# Allegro board pc042b_vsupply5v_02.brd
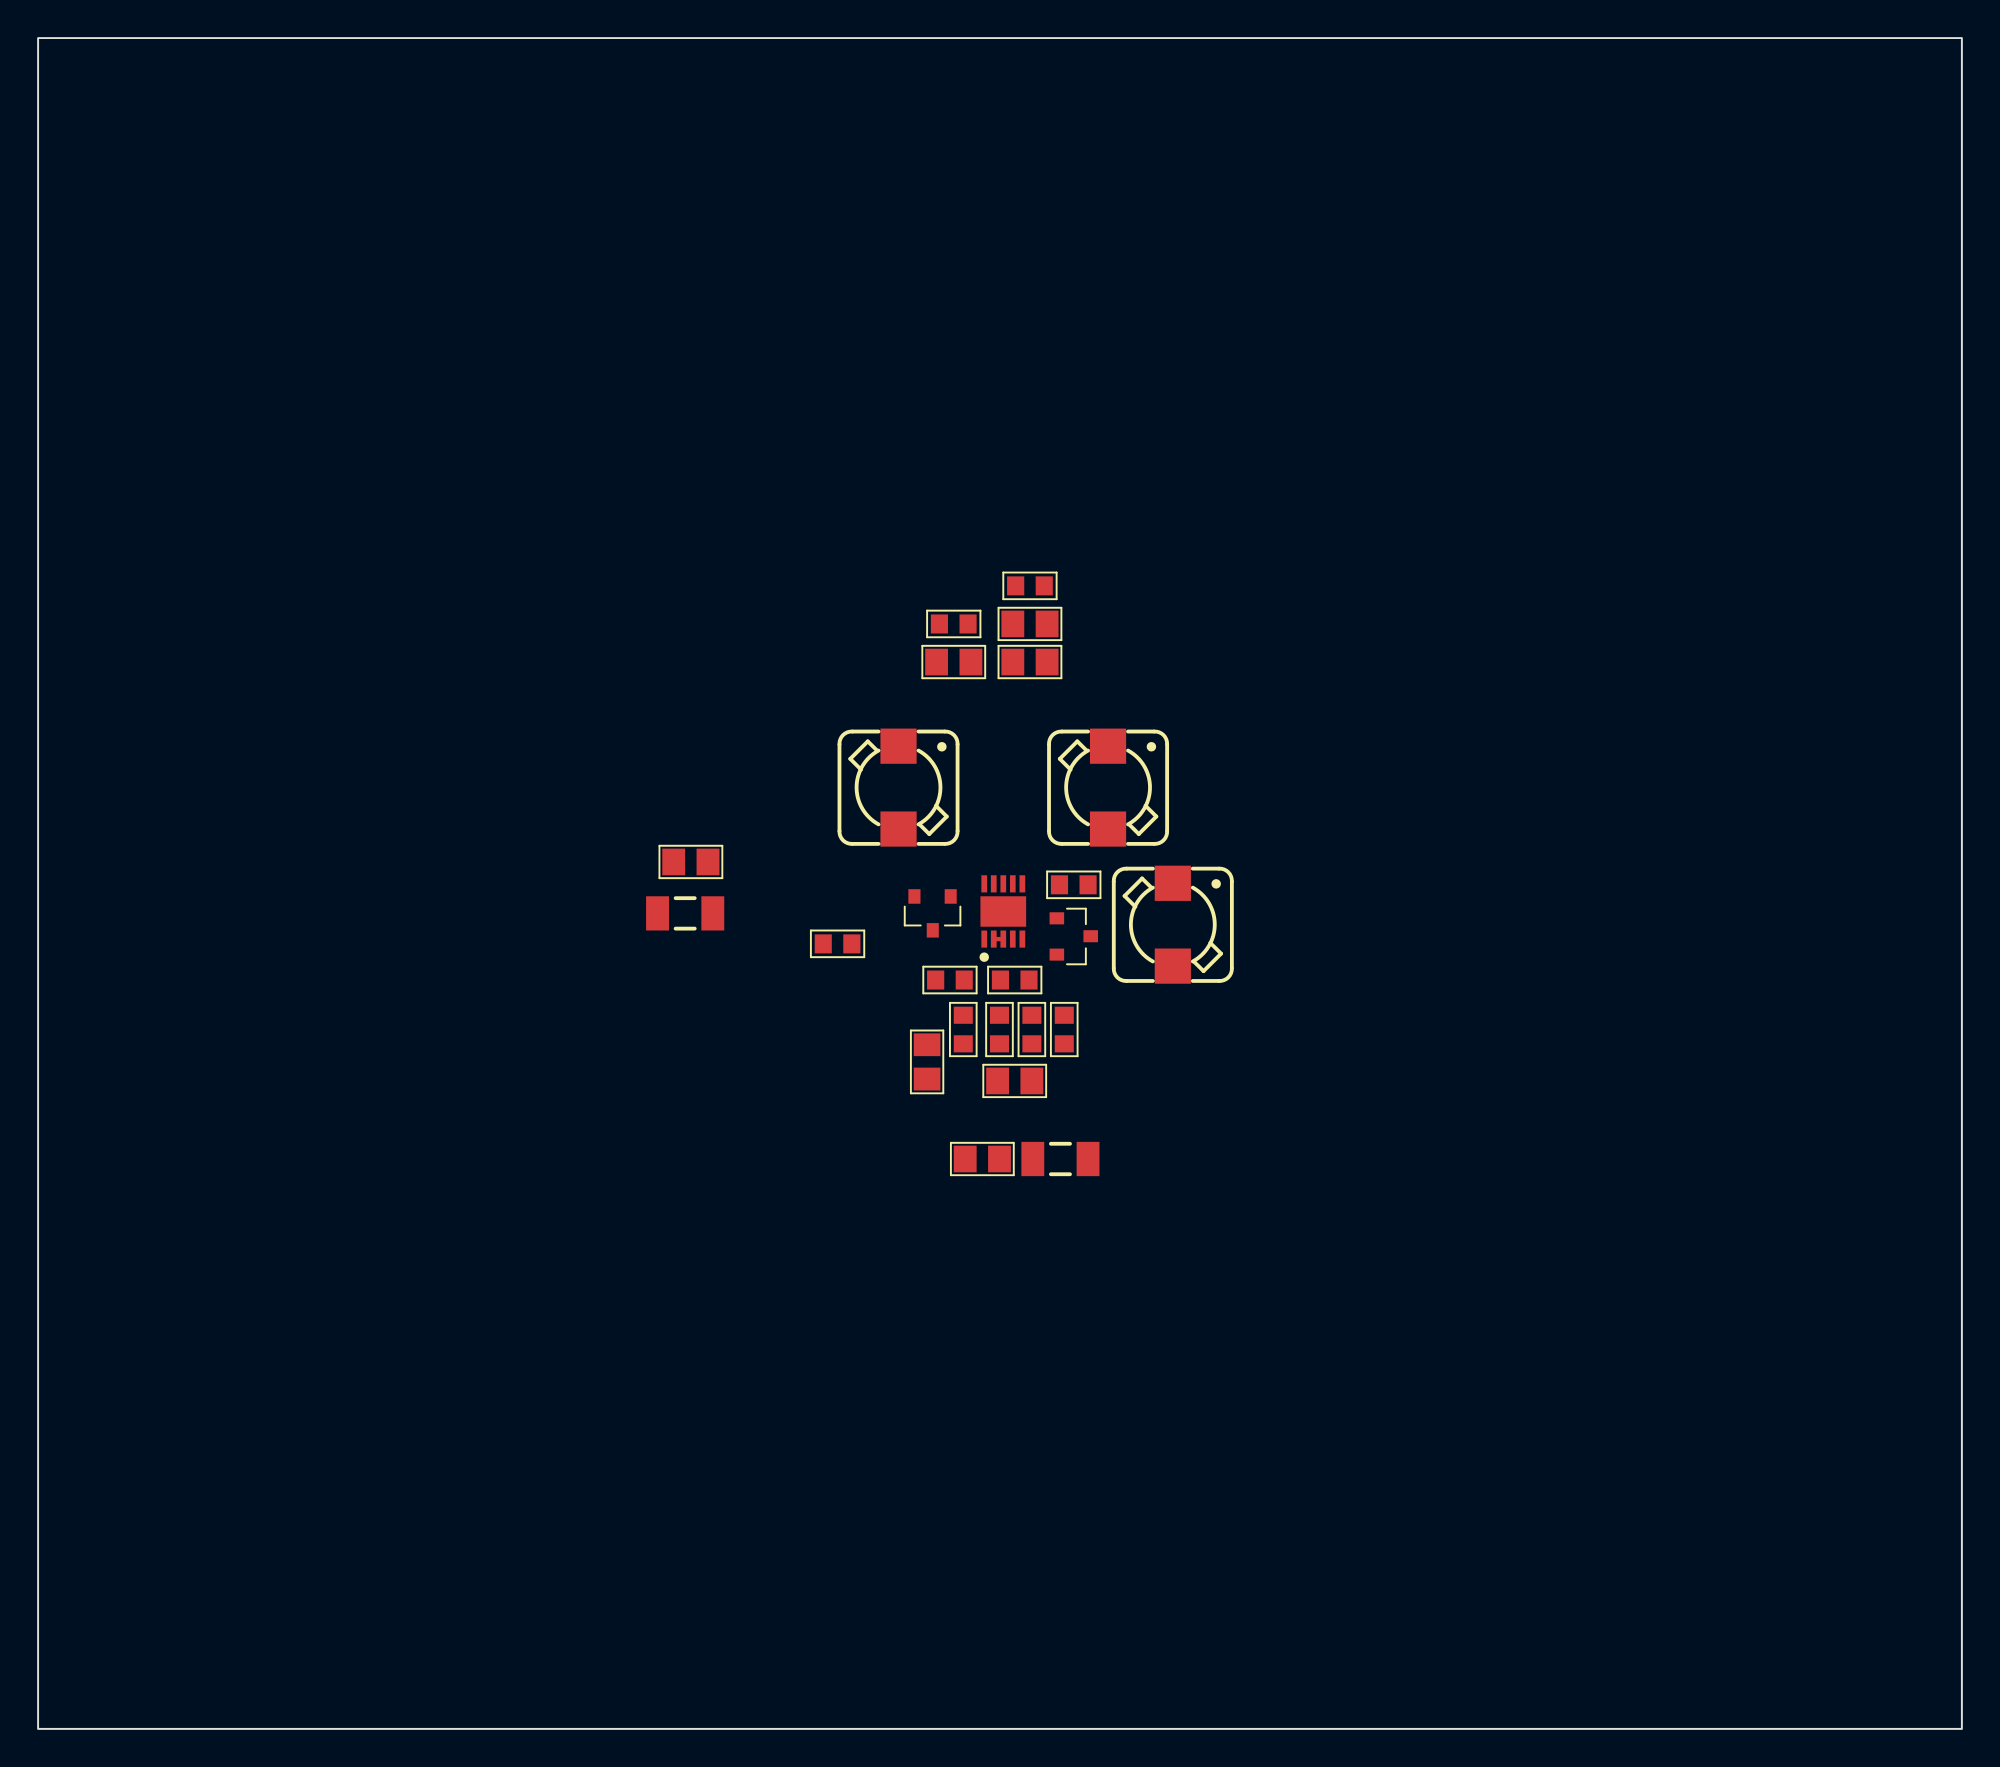
[diagram p0: board, top side]
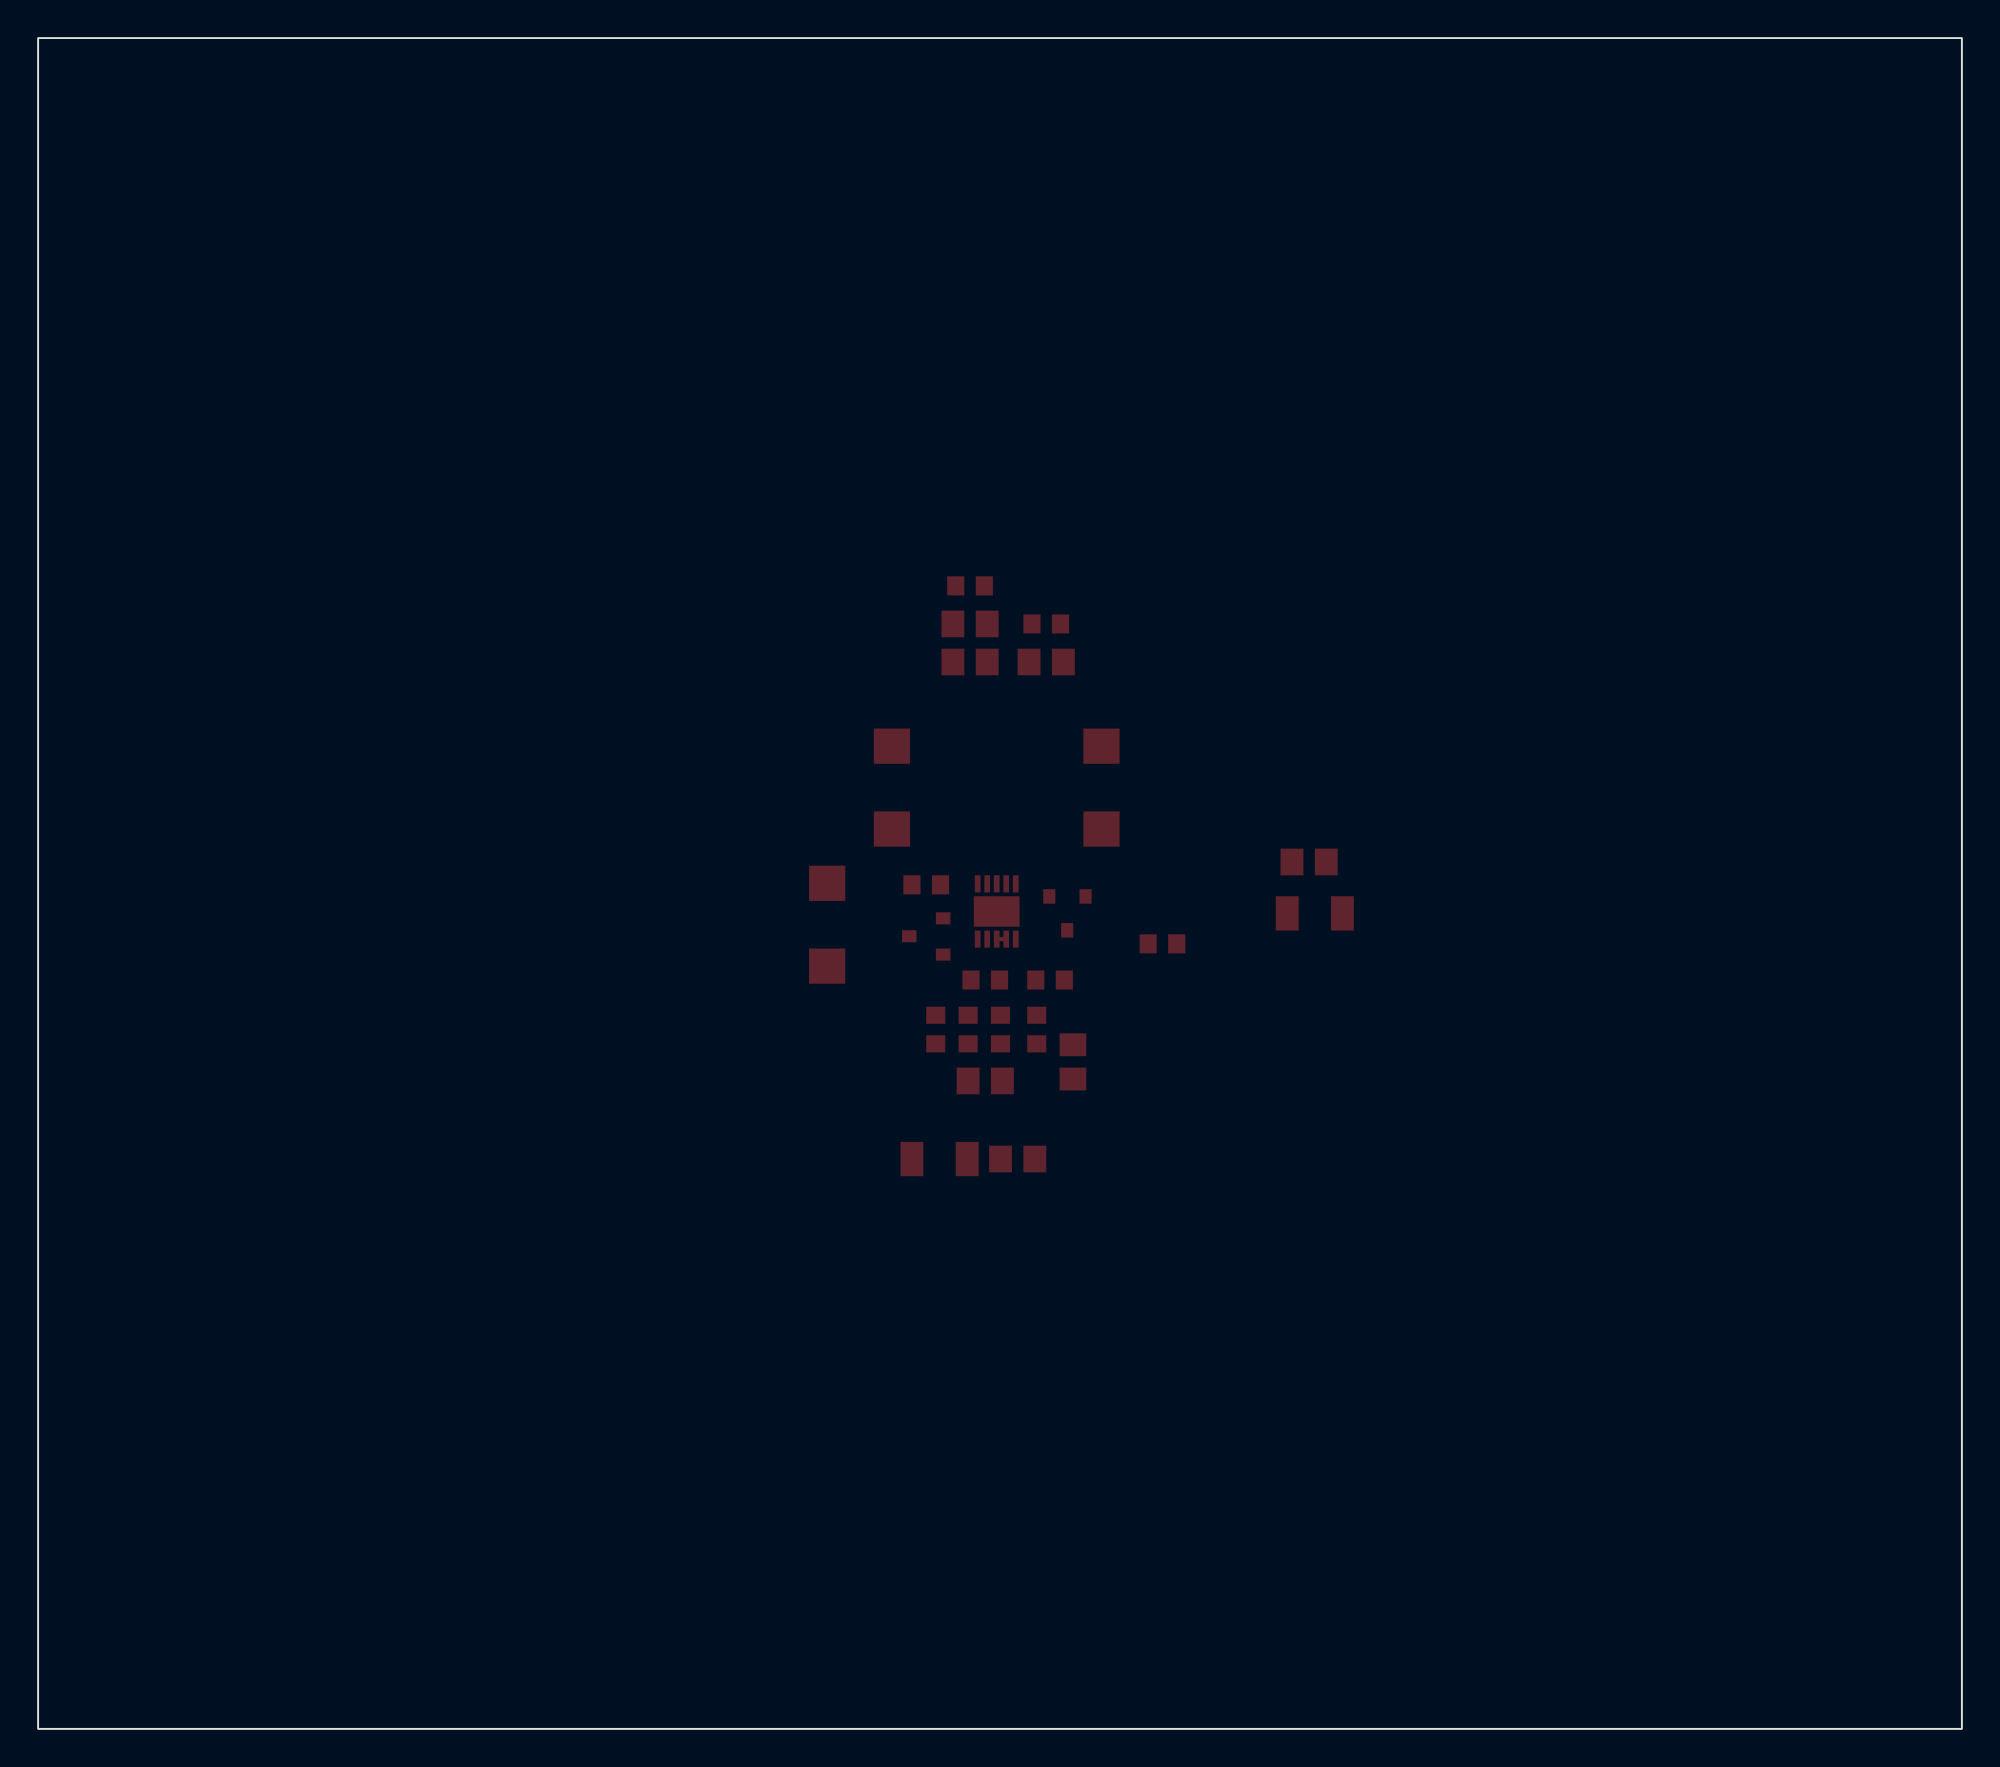
[diagram p1: board, bottom side, seen from below]

Outline 100.99 x 88.8 mm; copper layers: TOP, L2, L3, L4, L5, BOTTOM. Coordinates in mm from the lower left corner of the outline.
Outline path: rectangle 0,0 100.99,88.8

## Placement (name value [footprint] x y rotation side)
C1  10uF  [C0805]  52.07 58.03 0 top
C2  330nF  [C0805]  48.07 56.03 0 top
C3  330nF  [C0805]  52.07 56.03 180 top
C4  100nF  [C0603]  50.47 36.73 90 top
C5  1uF  [C0603]  54.37 44.33 0 top
C6  33pF  [C0603]  41.97 41.23 0 top
C7  10uF  [C0805]  51.27 34.03 0 top
C8  4.7uF  [C0805]  46.67 35.03 90 top
C9  68pF  [C0603]  53.87 36.73 90 top
C10  4.7uF  [C0805]  34.27 45.53 0 top
C11  4.7uF  [C0805]  49.57 29.93 180 top
IC1  -  [SON50P300X300X100-11N-R240X160]  50.67 42.93 90 top
L1  10uH  [IND_WURTH_XS]  45.17 49.43 270 top
L2  10uH  [IND_WURTH_XS]  56.17 49.43 270 top
L3  10uH  [IND_WURTH_XS]  59.57 42.23 270 top
L4  -  [INDC3216X130N]  33.97 42.83 0 top
L5  -  [INDC3216X130N]  53.67 29.93 0 top
NOREF  -  []  -47.45 -107.93 0 top
R1  4.7k  [C0603]  52.07 60.03 180 top
R2  4.7k  [C0603]  48.07 58.03 0 top
R3  20k  [C0603]  51.27 39.33 180 top
R4  110k  [C0603]  52.17 36.73 90 top
R5  90k9  [C0603]  48.57 36.73 90 top
R6  20k  [C0603]  47.87 39.33 0 top
U1  -  [SOT23]  46.97 42.83 270 top
U2  -  [SOT23]  54.37 41.63 0 top

## Library data of the parts
C1 C7 = CAPCERSMDCL2: part number: CAPCERSMDCL2_0805-10UF,10V_GEN; tolerance: 10%
C2 C3 = CAPCERSMDCL2: part number: CAPCERSMDCL2_0805-330NF,50V; tolerance: 10%
C4 = CAPCERSMDCL2: part number: CAPCERSMDCL2_0603-100NF,16V; tolerance: 10%
C5 = CAPCERSMDCL2: part number: CAPCERSMDCL2_0603-1UF,16V; tolerance: 10%
C6 = CAPCERSMDCL1: part number: CAPCERSMDCL1_0603-33PF,50V; tolerance: 5%
C8 C10 C11 = CAPCERSMDCL2: part number: CAPCERSMDCL2_0805-4.7UF,10V; tolerance: +80%-20%
C9 = CAPCERSMDCL1: part number: CAPCERSMDCL1_0603-68PF,50V; tolerance: 5%
IC1 = LT3471: part number: LT3471EDD#PBF
L1-L3 = INDUCTANCE: part number: INDUCTANCE_XS-10UH_25%
L4 L5 = FERRITE: part number: FERRITE_SMD-7427921,WURTH
R1 R2 = RSMD0603: part number: RSMD0603_1/16W-4K7,5%; tolerance: 5%
R3 R6 = RSMD0603: part number: RSMD0603_1/16W-20K,1%; tolerance: 1%
R4 = RSMD0603: part number: RSMD0603_100MW-110K,0.1%; tolerance: 0.1%
R5 = RSMD0603: part number: RSMD0603_1/16W-90K9,1%; tolerance: 1%
U1 U2 = HSMS2810

## Footprints (pads in the part's own frame, mm; a bottom-side part is the same pattern mirrored in y, then rotated)
C0603
  rect 0.9x1 smd: 1(-0.75,0) 2(0.75,0)
C0805
  rect 1.2x1.4 smd: 1(-0.9,0) 2(0.9,0)
IND_WURTH_XS
  rect 1.85x1.9 smd: 1(-2.18,0) 2(2.17,0)
INDC3216X130N
  rect 1.2x1.8 smd: 1(-1.45,0) 2(1.45,0)
SON50P300X300X100-11N-R240X160
  rect 0.9x0.3 smd: 1(-1.45,1) 2(-1.45,0.5) 3(-1.45,0) 4(-1.45,-0.5) 5(-1.45,-1) 6(1.45,-1) 7(1.45,-0.5) 8(1.45,0) 9(1.45,0.5) 10(1.45,1)
  rect 1.6x2.4 smd: 11(0,0)
SOT23
  rect 0.762x0.635 smd: 1(-0.889,0.94) 2(-0.889,-0.965) 3(0.889,0)

## Nets
GND_SIGNAL: C1.1(A<0>) C2.1(A<0>) C3.1(A<0>) C4.1(A<0>) C7.1(A<0>) C8.1(A<0>) C10.1(A<0>) C11.1(A<0>) IC1.5(FB2*) R6.1(A<0>) U2.3(C)
VIN: C1.2(B<0>) IC1.8(VIN) L1.1(A<0>) L2.1(A<0>) R1.1(A<0>) R2.1(A<0>)
+VOUT: C10.2(B<0>) L4.2(B)
-VOUT: C11.2(B<0>) L5.2(B)
EP: IC1.11
UNNAMED_1_CAPCERSMDCL1_I12_B: C6.2(B<0>) IC1.1(FB1*) R5.2(B<0>) R6.2(B<0>)
UNNAMED_1_CAPCERSMDCL1_I13_B: C9.2(B<0>) IC1.4(FB2) R3.1(A<0>) R4.2(B<0>)
UNNAMED_1_CAPCERSMDCL2_I9_B: C2.2(B<0>) IC1.9(SHDN/SS1*) R2.2(B<0>)
UNNAMED_1_CAPCERSMDCL2_I10_B: C3.2(B<0>) IC1.7(SHDN/SS2*) R1.2(B<0>)
UNNAMED_1_CAPCERSMDCL2_I11_A: C5.1(A<0>) IC1.6(SW2) L2.2(B<0>)
UNNAMED_1_CAPCERSMDCL2_I11_B: C5.2(B<0>) L3.1(A<0>) U2.1(A)
UNNAMED_1_CAPCERSMDCL2_I15_B: C6.1(A<0>) C8.2(B<0>) L4.1(A) R5.1(A<0>) U1.3(C)
UNNAMED_1_CAPCERSMDCL2_I17_B: C4.2(B<0>) IC1.2(FB1) IC1.3(VREF) R3.2(B<0>)
UNNAMED_1_CAPCERSMDCL2_I20_B: C7.2(B<0>) C9.1(A<0>) L3.2(B<0>) L5.1(A) R4.1(A<0>)
UNNAMED_1_HSMS2810_I48_A: IC1.10(SW1) L1.2(B<0>) U1.1(A)

Pads without a net: U1 2; U2 2

## Routing (per net, layer and track width the routed paths; a pad name or vN(x,y) marks a point on that pad's centre or on a via; arc(x,y) is an arc through that point)
UNNAMED_1_CAPCERSMDCL2_I17_B: length 0.5
  TOP w0.226: IC1.2 IC1.3

## Text on the board
PAGE_OUTLINE: D.Cussans | S.Nash | 3.3V --> +/- 5V DC-DC supply | PC042b_vsupply5v | 1/1
